# Altium PCB Gateway.PcbDoc
Units mil, origin at the board's own origin, x right, y up, seen from the top; angles counter-clockwise.
Board outline 3315 x 2695 mil, 2 copper layers (Top Layer, Bottom Layer); 11 components, 22 nets, 80 pads, 2 vias.
Unrouted connection lines stored in the file: 2.
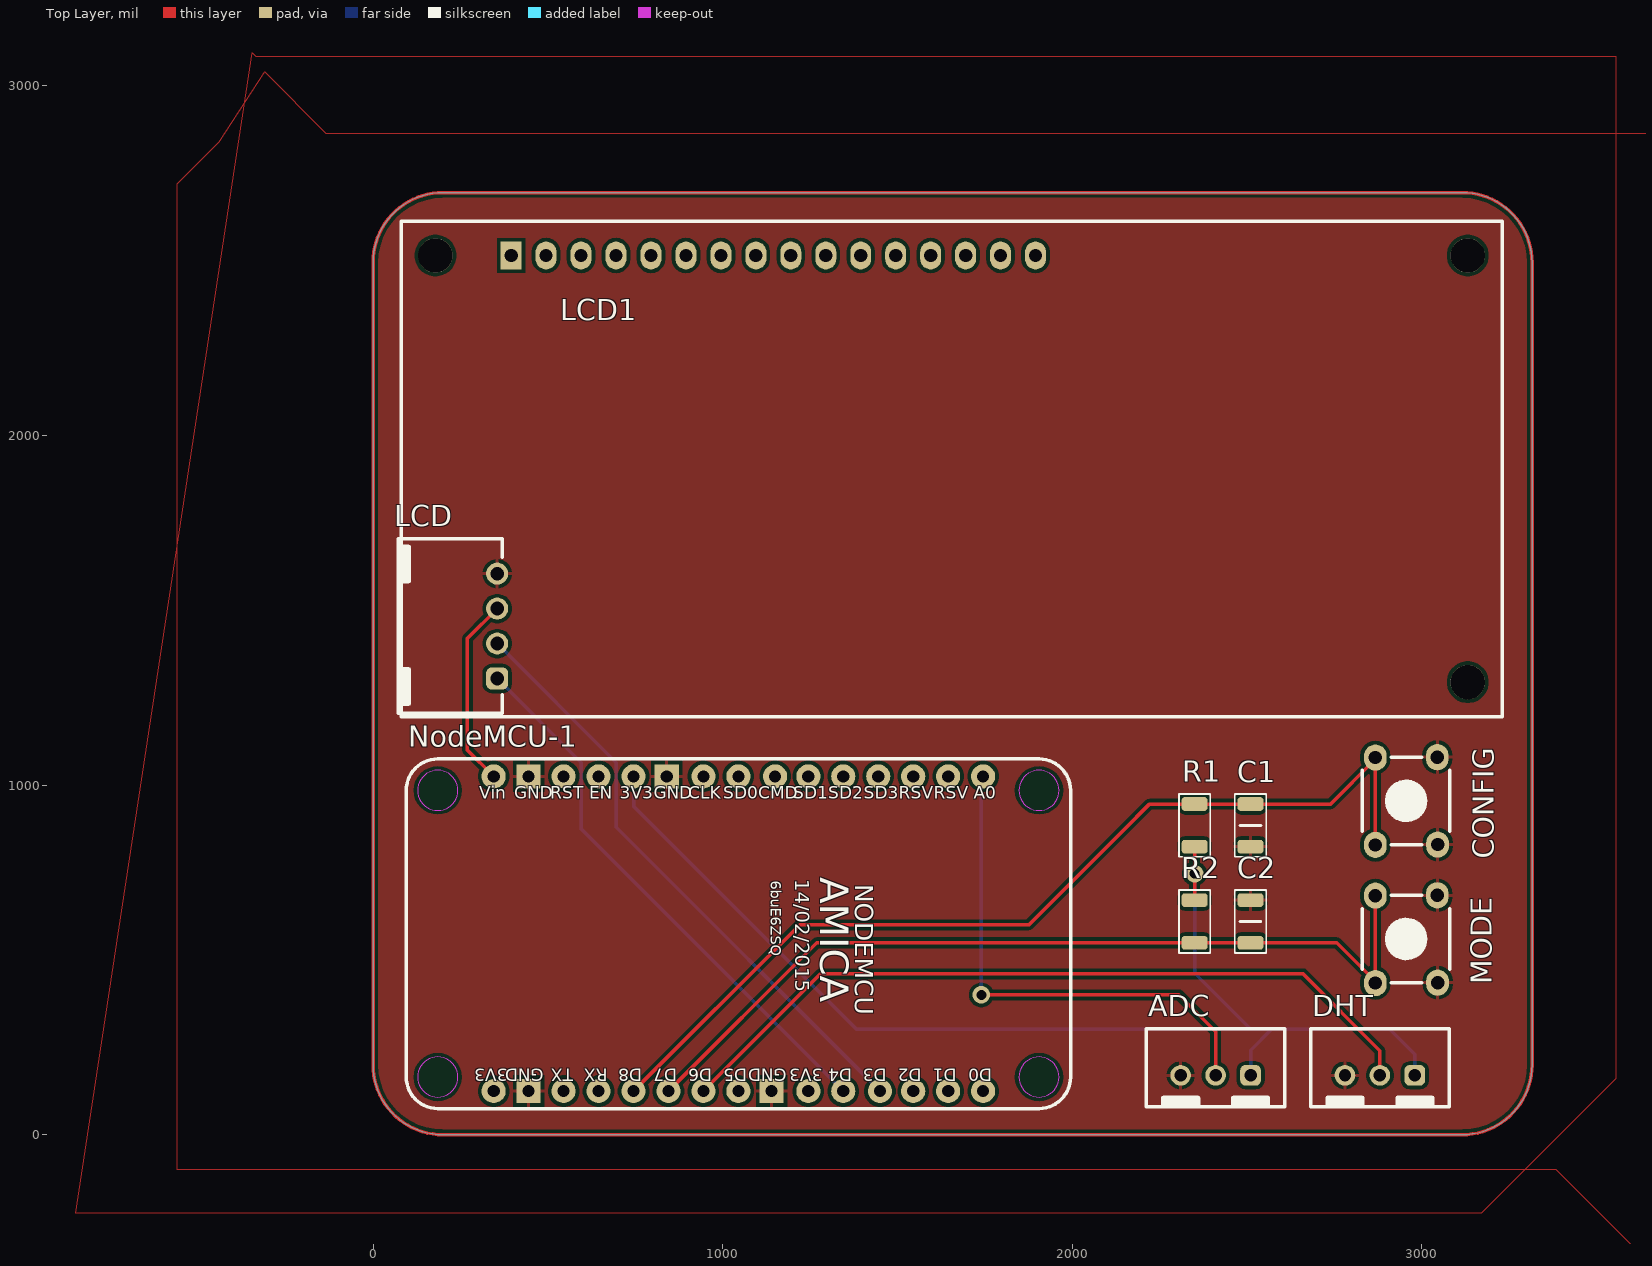
[diagram p0: Top Layer view]
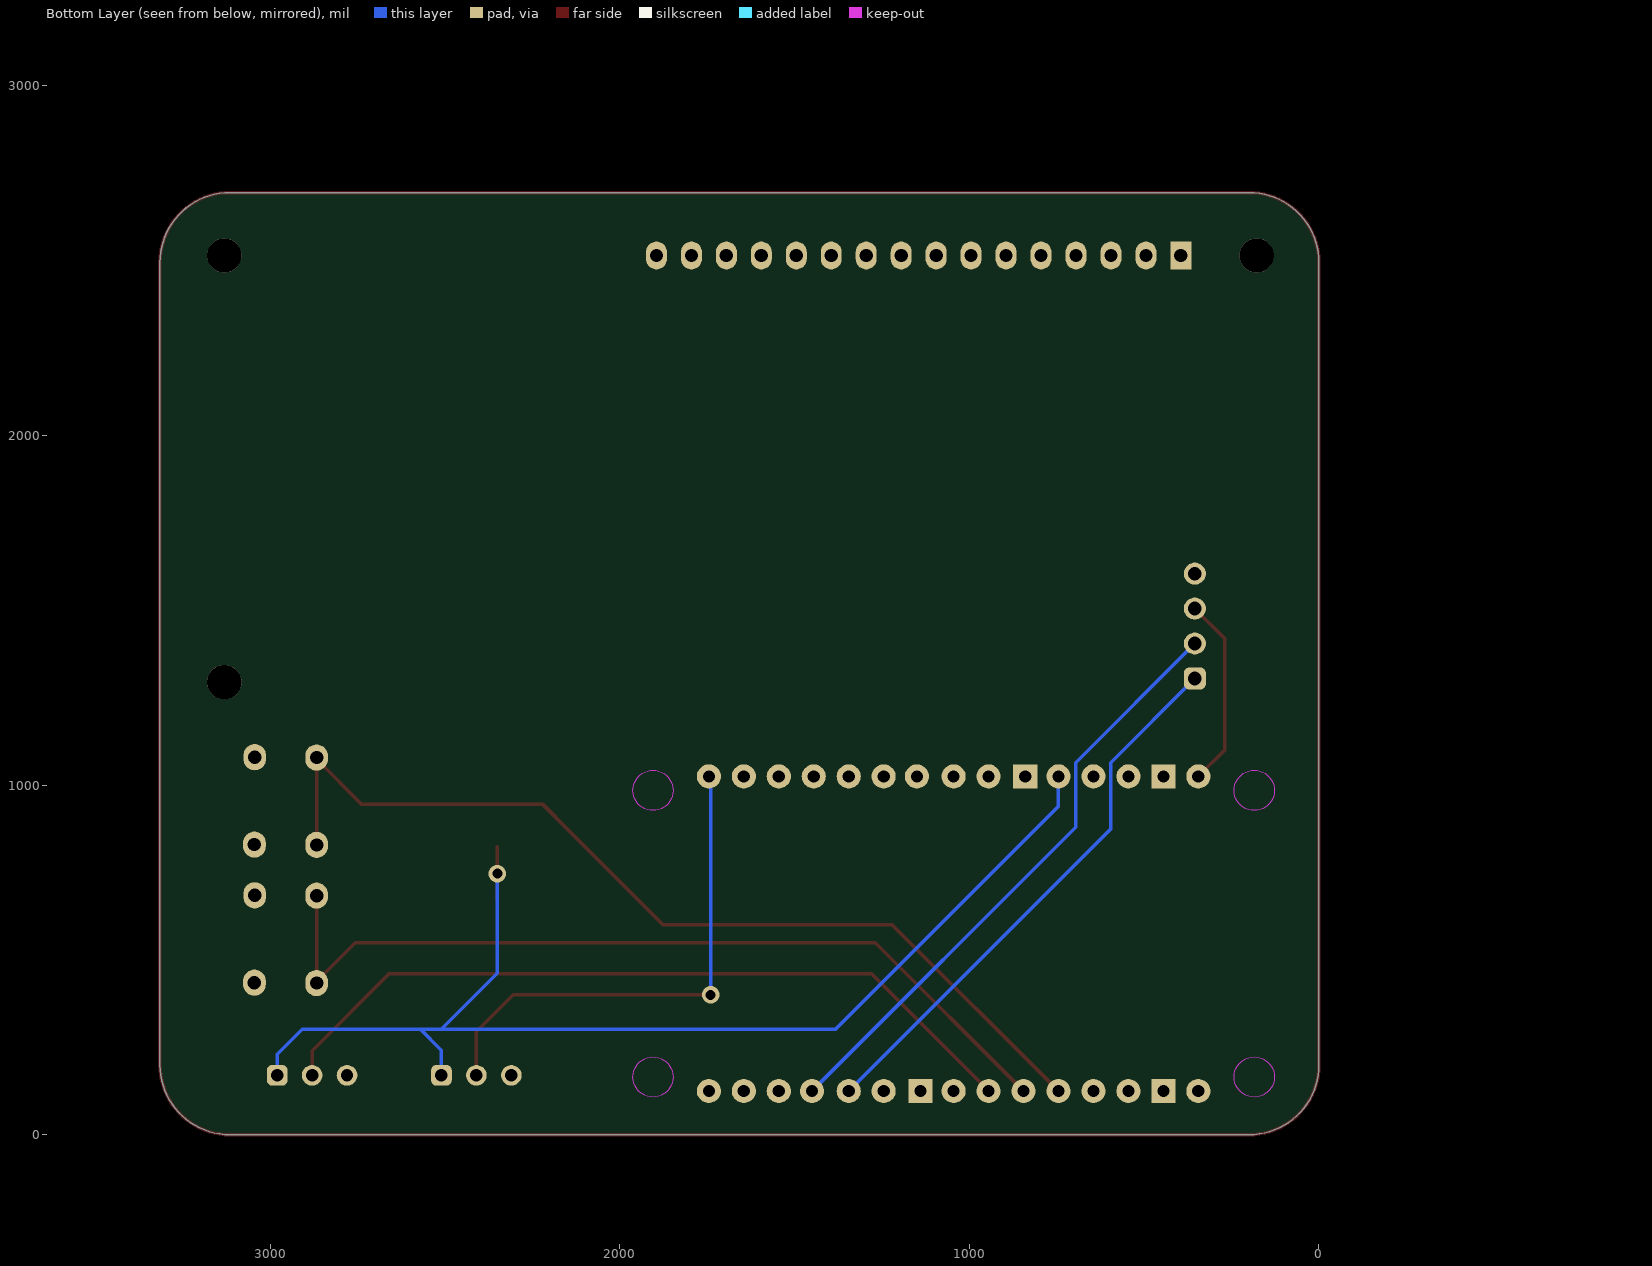
[diagram p1: Bottom Layer view, seen from below]

## Layer stack, top to bottom
Top Solder: solder mask 0.4, Solder Resist, Dk 3.5
Top Layer: signal copper 1.4
Dielectric 1: dielectric 12.6, FR-4, Dk 4.8
Bottom Layer: signal copper 1.4
Bottom Solder: solder mask 0.4, Solder Resist, Dk 3.5

## Board outline
0,200 0,2495 cw(c200,2495) 200,2695 3115,2695 cw(c3115,2495) 3315,2495 3315,200 cw(c3115,200) 3115,0 200,0 cw(c200,200)

## Design rules (kind name [scope] priority, off if disabled: settings)
Clearance [All] p1: gap=10 ignorepadtopadclearanceinfootprint=FALSE except(0: Arc-Hole Track-Hole SMDPad-Hole THPad-Hole Via-Hole Fill-Hole Poly-Hole Region-Hole Text-Hole)
PolygonConnect [All] p1: connectstyle=Relief reliefconductorwidth=10 reliefentries=4 polygonreliefangle="90 Angle" airgapwidth=10
RoomDefinition Smart_Home [InComponentClass('Smart_Home')] p1: confinementstyle=ConfineIn formatcopy=TRUE lockcomponents=FALSE outline -1590,-2055 410,-2055 410,-1055 -1590,-1055
RoutingVias [All] p1: holewidth=28 width=50 viastyle="Through Hole" minholewidth=28 minwidth=50 maxholewidth=28 maxwidth=50
SolderMaskExpansion [All] p1: expansion=4 istentingtop=FALSE
Width [All] p1: maxlimit=10 minlimit=10 preferedwidth=10
30 further rules are at their usual default settings.

## Components (designator, comment, footprint, x,y, rotation, side; value= is the part's Value field where it differs from the comment)
ADC "Header 3" XH2.54-3P 2310,170 r180 top
C1 "0.1uf" "C 1206 (3216)" 2510,885 r270 top
C2 "0.1uf" "C 1206 (3216)" 2509.37,610 r90 top
CONFIG "Tact Switch" SW/4/DIP/SMALL 2955,955 r0 top (schematic designator SW1)
DHT "Header 3" XH2.54-3P 2780,170 r180 top
LCD "Header 4" XH2.54-4P-RA 355,1455 r90 top
LCD1 "LCD 16x2" "LCD 16x2" 394.96,2515 r0 top
MODE "Tact Switch" SW/4/DIP/SMALL 2955,560 r0 top (schematic designator SW2)
NodeMCU-1 "NodeMCU V1" "NodeMCU V1.0 ESP-12E" 1991,1076 r270 top
R1 "R" "R 1206 (3216)" 2350,885 r90 top
R2 "R" "R 1206 (3216)" 2350,610 r270 top

## Footprints (in the part's own frame and the unit in brackets; to place one, negate y for a bottom-side part, rotate by r counter-clockwise, add the part's x,y. Pads: shape width x height; smd on the part's side, far side on the other; paste and mask are expansions set on the pad)
"C 1206 (3216)" [mm] "Chip Capacitor, 2-Leads, Body 2.0x1.3mm, IPC Medium Density"
  rrect50% 1x1.9 smd: 1(-1.55,-0.008) 2(1.55,-0.008)
  silkscreen extent -2.29,-1.15 2.29,1.14, body extent -1.6,-0.8 1.6,0.8, height 0.94
"LCD 16x2" [mil]
  rect 60x80 / inner round 60 / far side rect 60x80 hole 38: 1(0,0)
  oval 60x80 / inner round 60 / far side oval 60x80 hole 38: 2(100,0) 3(200,0) 4(300,0) 5(400,0) 6(500,0) 7(600,0) 8(700,0) 9(800,0) 10(900,0) 11(1000,0) 12(1100,0) 13(1200,0) 14(1300,0) 15(1400,0) 16(1500,0)
  round 98.43 hole 98.43: HOLE(-216.54,0) HOLF(2736.22,0) HOLG(2736.22,-1220.47)
  round 0 all layers, no hole: HOLH(-216.54,-1220.47)
  silkscreen extent -315,-1319 2835,98, body extent -314,-1318 2845,100, height 710
"NodeMCU V1.0 ESP-12E" [mil]
  round 0 all layers, no hole paste-300 mask-300: 0(91,-86) 0(91,-1806) 0(911,-86) 0(911,-1806)
  round 69 hole 35: 3V3(51,-1246) 3V3(951,-746) 3V3(951,-1646) A0(51,-246) CLK(51,-1046) CMD(51,-841) D0(951,-246) D1(951,-346) D2(951,-446) D3(951,-541) D4(951,-646) D5(951,-946) D6(951,-1046) D7(951,-1146) D8(951,-1246) EN(51,-1346) RST(51,-1446) RSV(51,-346) RSV(51,-446) RX(951,-1346) SD0(51,-946) SD1(51,-746) SD2(51,-646) SD3(51,-546) TX(951,-1446) VIN(51,-1646)
  rect 69x69 hole 35: GND(51,-1151) GND(51,-1546) GND(951,-851) GND(951,-1546)
  Keep-Out Layer circle w2: c91,-86 r57.5
  Keep-Out Layer circle w2: c911,-86 r57.5
  Keep-Out Layer circle w2: c91,-1806 r57.5
  Keep-Out Layer circle w2: c911,-1806 r57.5
  silkscreen extent 1,-1896 1001,4
"R 1206 (3216)" [mm] "Chip Resistor, 2-Leads, Body 3.1x1.6mm, IPC Medium Density"
  rrect50% 1x1.9 smd: 1(-1.55,0) 2(1.55,0)
  silkscreen extent -2.29,-1.14 2.29,1.14, body extent -1.6,-0.8 1.6,0.8, height 0.6
SW/4/DIP/SMALL [mil]
  oval 65x75 hole 38: 1(-88,124) 2(89,125) 3(90,-125) 4(-88,-126)
  silkscreen extent -125,-125 125,125, body extent -119,-152 119,152, height 197
XH2.54-3P [mm]
  rrect50% 1.5x1.5 hole 0.9: 1(-5.08,0)
  round 1.5 hole 0.9: 2(-2.54,0) 3(0,0)
  silkscreen extent -7.58,-3.4 2.5,2.4, body extent -7.42,-3.4 2.34,2.44, height 7.21
XH2.54-4P-RA [mm]
  rrect50% 1.6x1.6 hole 1: 1(-3.81,0)
  round 1.6 hole 1: 2(-1.27,0) 3(1.27,0) 4(3.81,0)
  silkscreen extent -6.35,-0.38 6.35,7.19, body extent -6.15,-0.3 6.15,7.73, height 5.84

## Part data
ADC DHT: "Header, 3-Pin"
C1 C2: library part "Capacitor NP", "Capacitor non-pol"
CONFIG MODE: library part "SW SPST-4", "Tact switch 4 pin"
LCD: "Header, 4-Pin"
LCD1: "Character LCD 16x2"
NodeMCU-1: library part "NodeMCU V1.0 ESP-12E", "NodeMCU V1.0 ESP8266 (ESP-12E)"
R1 R2: library part Resistor, "Resistor", LatestRevisionDate=17-Jul-2002, LatestRevisionNote="Re-released for DXP Platform.", PackageReference=AXIAL-0.3, Published=8-Jun-2000, Publisher="Altium Limited"

## Via types
v1: diameter 50, hole 28, Top Layer to Bottom Layer, 2 vias

## Nets (pads, with @x,y where several pads share a name; then routed paths per layer and width w, separated by ;. In a path a pad name is that pad's centre, name@x,y a point inside that pad or via, vN(x,y) a via of type N, cw(c..) or ccw(c..) an arc to the next point about the centre after c; other vN are vias at no path point)
+5: LCD.3 NodeMCU-1.VIN | length 546.3
  Top Layer w10: NodeMCU-1.VIN 270,1100 270,1420 LCD.3
A0: ADC.2 NodeMCU-1.A0 | length 1465.6
  Top Layer w10: v1(1740,400) 2305,400 2410,295 ADC.2
  Bottom Layer w10: v1(1740,400) 1740,1020 NodeMCU-1.A0
D3: LCD.2 NodeMCU-1.D3 | length 1733.6
  Bottom Layer w10: LCD.2 695.5,1064.5 695.5,879.5 NodeMCU-1.D3
D4: LCD.1 NodeMCU-1.D4 | length 1590.1
  Bottom Layer w10: LCD.1 595.5,1064.5 595.5,874.5 NodeMCU-1.D4
D5: NodeMCU-1.D5
D6: DHT.2 NodeMCU-1.D6 | length 2234.9
  Top Layer w10: NodeMCU-1.D6 1280,460 2660,460 2880,240 DHT.2
D7: C2.1 MODE.1 MODE.4 NodeMCU-1.D7 R2.2 | length 2493.2
  Top Layer w10: NodeMCU-1.D7 1268.98,548.98 R2.2 C2.1 2757.02,548.98 MODE.4@2867,439 ; MODE.4 MODE.4@2867,439 ; MODE.1 MODE.4@2867,439
D8: C1.1 CONFIG.1 CONFIG.4 NodeMCU-1.D8 R1.2 | length 2765.1
  Top Layer w10: NodeMCU-1.D8 1220,600 1875,600 2145,870 2221.02,946.02 R1.2 C1.1 2739.02,946.02 CONFIG.1@2867,1074 ; CONFIG.4 CONFIG.1@2867,1074 ; CONFIG.1 CONFIG.1@2867,1074
GND: ADC.3 C1.2 C2.2 CONFIG.2 CONFIG.3 DHT.3 LCD.4 MODE.2 MODE.3 NodeMCU-1.GND
NetD1_2: 
NetD2_2: 
"NetLED 1_1": 
"NetLED 2_1": 
NetP1_1: 
NetP1_2: 
NetP1_3: 
NetP2_1: 
NetP2_2: 
NetP2_3: 
NetQ1_1: 
NetQ2_1: 
V3.3: ADC.1 DHT.1 NodeMCU-1.3V3 R1.1 R2.1 | length 3495.2
  Top Layer w10: R2.1 v1(2350,746.98) R1.1
  Bottom Layer w10: NodeMCU-1.3V3@745,1025 745,940 1382.8,302.2 2510,302.2 ; v1(2350,746.98) 2350,462.2 2510,302.2 ; ADC.1 2510,242.2 2570,302.2 ; DHT.1 2980,230 2907.8,302.2 2570,302.2 ; 2510,302.2 2570,302.2
pads on no net: LCD1.1 LCD1.2 LCD1.3 LCD1.4 LCD1.5 LCD1.6 LCD1.7 LCD1.8 LCD1.9 LCD1.10 LCD1.11 LCD1.12 LCD1.13 LCD1.14 LCD1.15 LCD1.16 LCD1.HOLE LCD1.HOLF LCD1.HOLG LCD1.HOLH NodeMCU-1.0 NodeMCU-1.CLK NodeMCU-1.CMD NodeMCU-1.D0 NodeMCU-1.D1 NodeMCU-1.D2 NodeMCU-1.EN NodeMCU-1.RST NodeMCU-1.RSV NodeMCU-1.RX NodeMCU-1.SD0 NodeMCU-1.SD1 NodeMCU-1.SD2 NodeMCU-1.SD3 NodeMCU-1.TX
copper on no net: | length 11676.6
  Top Layer w10: 0,200 ccw(c200,200) 200,0 3115,0 ccw(c3115,200) 3315,200 3315,2495 ccw(c3115,2495) 3115,2695 200,2695 ccw(c200,2495) 0,2495 0,200

## Polygon pours and split planes (outlines as drawn)
GND on Top Layer "GND_L01_P002" (solid, remove dead copper, pour order 2): -375,3060 4030,3060 4215,2875 3595,2255 3595,-330 -105,-330 -210,-435
GND on Top Layer "NONET_L01_P001" (solid, remove dead copper, shelved, pour order 1): -345,3095 -335,3085 3555,3085 3555,160 3170,-225 -850,-225
GND on Top Layer "NONET_L01_P000" (solid, remove dead copper, shelved, pour order 0): -310,3040 -135,2865 3755,2865 3755,-230 3635,-350 3385,-100 -560,-100 -560,2720 -440,2840

## Text inside footprints (layer, text, board x,y; h text height)
NodeMCU-1: Top Overlay "GND" at 803,950 h60; Top Overlay "3V3" at 706,950 h60; Top Overlay "EN" at 619,950 h60; Top Overlay "RST" at 507,950 h60; Top Overlay "GND" at 404,950 h60; Top Overlay "Vin" at 304,950 h60; Top Overlay "D7" at 869.77,200 h60 r180; Top Overlay "D8" at 769.89,200 h60 r180; Top Overlay "RX" at 670.94,200 h60 r180; Top Overlay "TX" at 572,200 h60 r180; Top Overlay "GND" at 488.8,200 h60 r180; Top Overlay "3V3" at 385,200 h60 r180; Top Overlay "D6" at 970.88,200 h60 r180; Top Overlay "CMD" at 1101.86,950 h60; Top Overlay "D0" at 1771,200 h60 r180; Top Overlay "D1" at 1669.65,200 h60 r180; Top Overlay "D2" at 1569.42,200 h60 r180; Top Overlay "D3" at 1469.42,200 h60 r180; Top Overlay "D4" at 1371,200 h60 r180; Top Overlay "3V3" at 1285.99,200 h60 r180; Top Overlay "GND" at 1184,200 h60 r180; Top Overlay "D5" at 1070,200 h60 r180; Top Overlay "A0" at 1718,950 h60; Top Overlay "RSV" at 1604,950 h60; Top Overlay "RSV" at 1503.57,950 h60; Top Overlay "SD3" at 1403.14,950 h60; Top Overlay "SD2" at 1302.71,950 h60; Top Overlay "SD1" at 1202.29,950 h60; Top Overlay "SD0" at 1001.43,950 h60; Top Overlay "CLK" at 901,950 h60; Top Overlay "6buE6ZSQ" at 1138,727 h30 r270; Top Overlay "NODEMCU" at 1362,716 h90 r270; Top Overlay "AMICA" at 1252,737 h140 r270; Top Overlay "14/02/2015" at 1193,731 h69 r270